# EAGLE board rough (EAGLE 4.13)
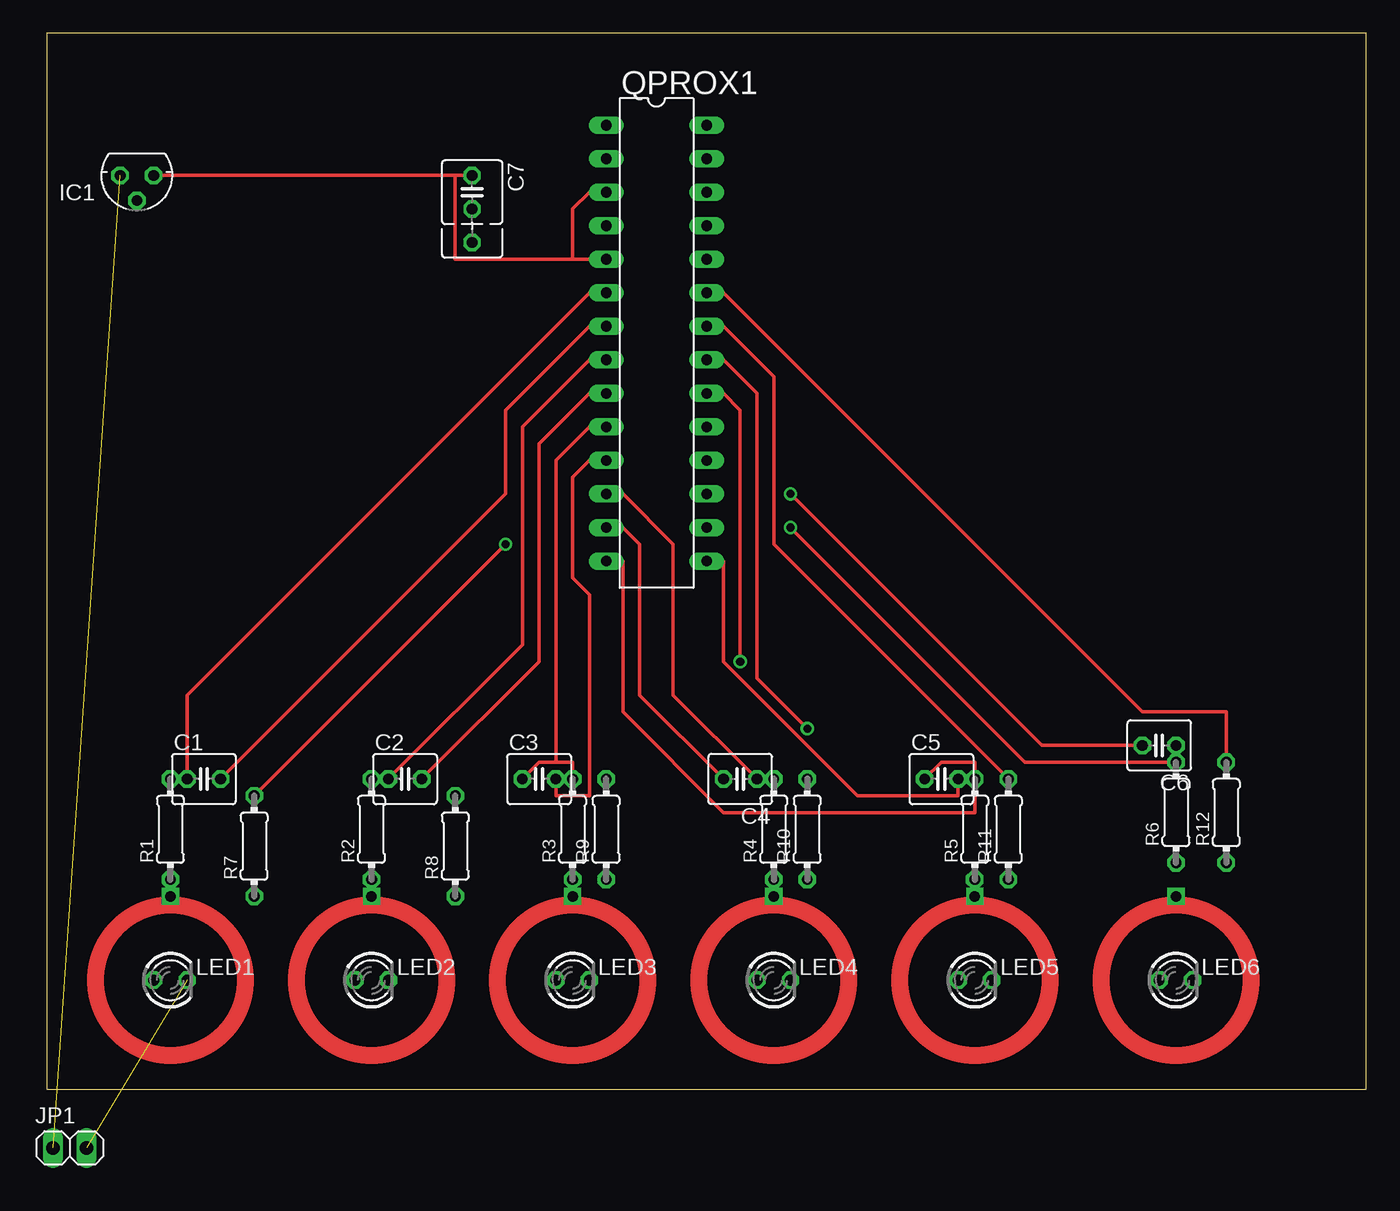
[diagram p0: board, top side]
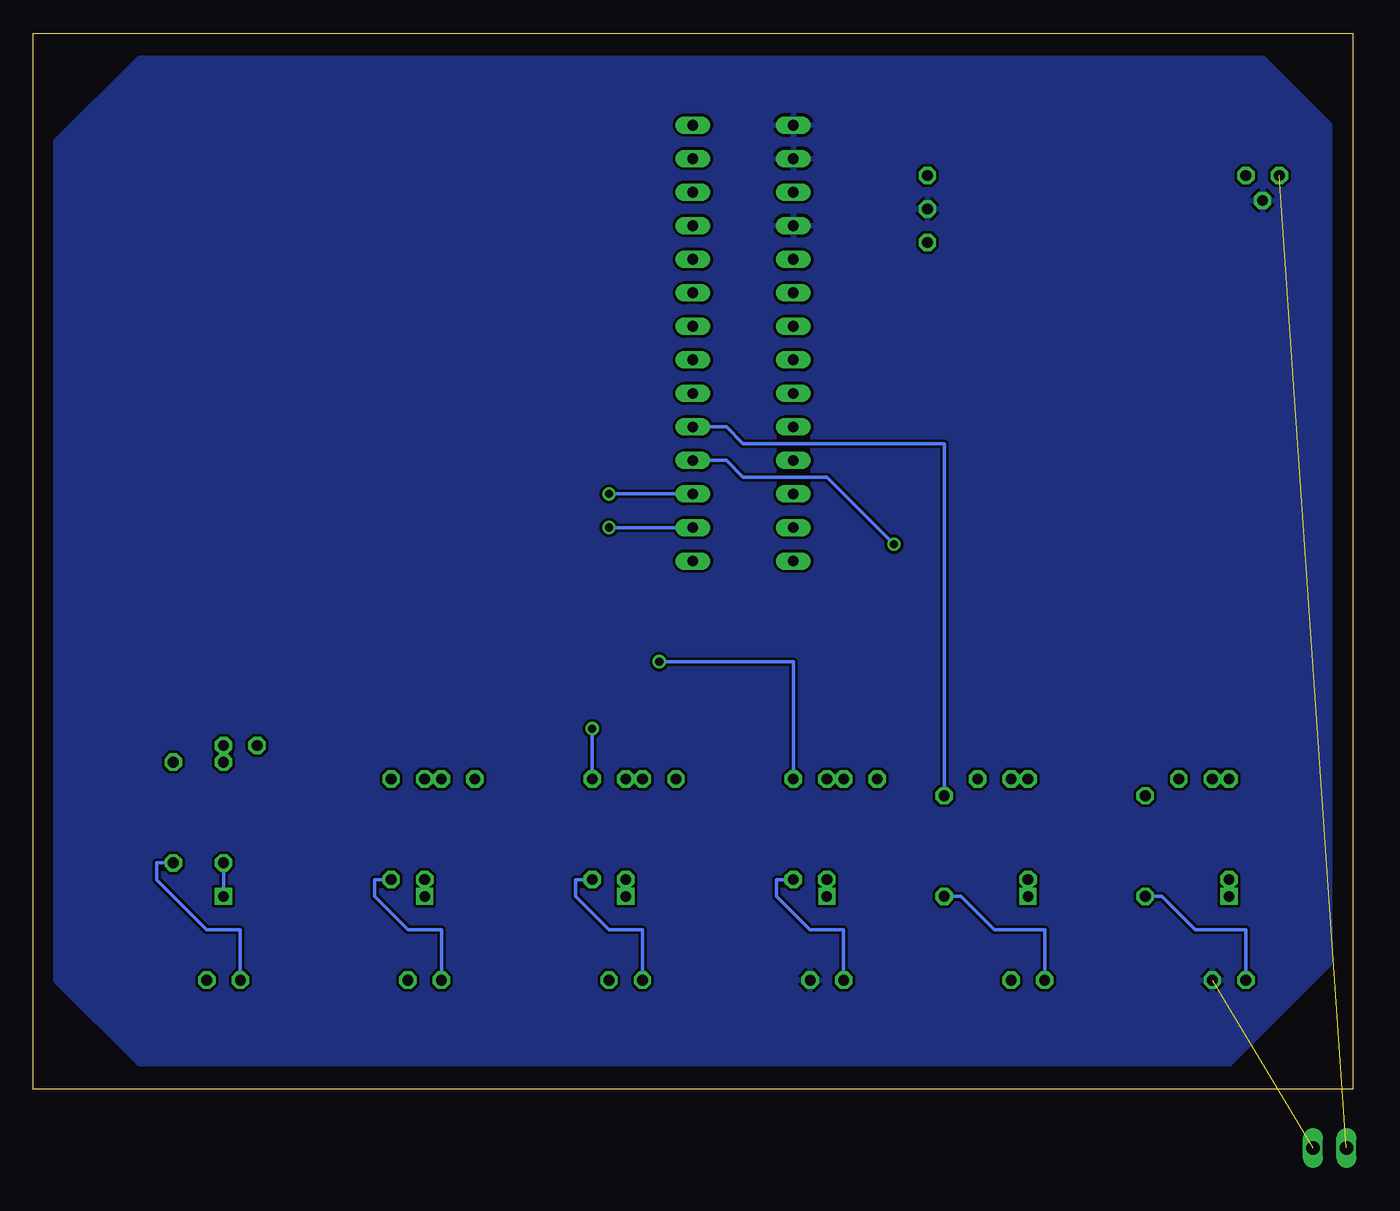
[diagram p1: board, bottom side, seen from below]

Size 100 x 80 mm. Coordinates in mm from the lower left corner, seen from the top.
Outline: 0,0 100,0 100,80 0,80 0,0
Copper layers (1*16): Top 0.035mm / dielectric 1.5mm / Bottom 0.035mm
Design rules "default": minimum track width 10mil, minimum drill 24mil, track to track 8mil, track to pad 8mil, pad to pad 8mil, via to via 8mil, smd to smd 8mil, copper to edge 40mil, drill to drill 8mil, minimum pad ring 10mil, minimum via ring 8mil, stop-mask expansion 4mil, vias tented up to drill 0mil, thermal gap 10mil

## Footprints (pad centres in the part's own frame; a part is rotated, then mirrored left to right if it is on the bottom)
C025-040X050 = drill 0.813 octagon: 1 -1.27,0; 2 1.27,0
C025_050-045X075 = drill 0.813 octagon: 1 -1.27,0; 2 1.27,0; 3 3.81,0
78LXX = drill 0.813 octagon: GND 0,1.905; IN 1.27,0; OUT -1.27,0
1X02 = drill 1.016 long: 1 -1.27,0; 2 1.27,0
LED3MM = drill 0.813 octagon: A -1.27,0; K 1.27,0
DIL28-3 = drill 0.813 long: 1 -16.51,-3.81; 2 -13.97,-3.81; 3 -11.43,-3.81; 4 -8.89,-3.81; 5 -6.35,-3.81; 6 -3.81,-3.81; 7 -1.27,-3.81; 8 1.27,-3.81; 9 3.81,-3.81; 10 6.35,-3.81; 11 8.89,-3.81; 12 11.43,-3.81; 13 13.97,-3.81; 14 16.51,-3.81; 15 16.51,3.81; 16 13.97,3.81; 17 11.43,3.81; 18 8.89,3.81; 19 6.35,3.81; 20 3.81,3.81; 21 1.27,3.81; 22 -1.27,3.81; 23 -3.81,3.81; 24 -6.35,3.81; 25 -8.89,3.81; 26 -11.43,3.81; 27 -13.97,3.81; 28 -16.51,3.81
0204/7 = drill 0.813 octagon: 1 -3.81,0; 2 3.81,0
PAD1 = drill 0.8 square: P$1 0,6.35

## Placement (x,y rotation side)
C1  [C025-040X050]  11.9,23.49 0 top
C2  [C025-040X050]  27.14,23.49 0 top
C3  [C025-040X050]  37.3,23.49 0 top
C4  [C025-040X050]  52.54,23.49 180 top
C5  [C025-040X050]  67.78,23.49 0 top
C6  [C025-040X050]  84.29,26.03 180 top
C7  [C025_050-045X075]  32.22,67.94 270 top
IC1  [78LXX]  6.82,69.21 180 top
JP1  [1X02]  1.74,-4.45 0 top  (outside the outline)
LED1  [LED3MM]  9.36,8.25 0 top
LED2  [LED3MM]  24.6,8.25 0 top
LED3  [LED3MM]  39.84,8.25 0 top
LED4  [LED3MM]  55.08,8.25 0 top
LED5  [LED3MM]  70.32,8.25 0 top
LED6  [LED3MM]  85.56,8.25 0 top
QPROX1  [DIL28-3]  46.19,56.51 270 top
R1  [0204/7]  9.36,19.68 90 top
R2  [0204/7]  24.6,19.68 90 top
R3  [0204/7]  39.84,19.68 90 top
R4  [0204/7]  55.08,19.68 90 top
R5  [0204/7]  70.32,19.68 90 top
R6  [0204/7]  85.56,20.95 90 top
R7  [0204/7]  15.71,18.41 90 top
R8  [0204/7]  30.95,18.41 90 top
R9  [0204/7]  42.38,19.68 90 top
R10  [0204/7]  57.62,19.68 90 top
R11  [0204/7]  72.86,19.68 90 top
R12  [0204/7]  89.37,20.95 90 top
U$1  PAD  [PAD1]  9.36,8.25 0 top
U$2  PAD  [PAD1]  24.6,8.25 0 top
U$3  PAD  [PAD1]  39.84,8.25 0 top
U$4  PAD  [PAD1]  55.08,8.25 0 top
U$5  PAD  [PAD1]  70.32,8.25 0 top
U$6  PAD  [PAD1]  85.56,8.25 0 top

## Library data of the parts
C1-C7 R1-R12 = rcl
IC1 = v-reg
JP1 = pinhead
LED1-LED6 = led
QPROX1 U$1-U$6 = QProx

## Nets
GND: C7.2 IC1.GND JP1.2 LED1.K LED3.K QPROX1.1 QPROX1.2 QPROX1.4
N$1: C1.1 QPROX1.6 R1.2
N$2: C2.1 QPROX1.8 R2.2
N$3: C3.1 QPROX1.10 R3.2
N$4: C4.1 QPROX1.12 R4.2
N$5: C5.1 QPROX1.14 R5.2
N$6: C6.1 QPROX1.16 R6.2
N$7: R1.1 U$1.P$1
N$8: C1.2 QPROX1.7
N$9: R2.1 U$2.P$1
N$10: C2.2 QPROX1.9
N$11: R3.1 U$3.P$1
N$12: C3.2 QPROX1.11
N$13: R4.1 U$4.P$1
N$14: C4.2 QPROX1.13
N$15: R5.1 U$5.P$1
N$16: C5.2 QPROX1.15
N$17: R6.1 U$6.P$1
N$18: C7.1 IC1.OUT QPROX1.3 QPROX1.5
N$19: C6.2 QPROX1.17
N$20: QPROX1.23 R12.2
N$21: LED1.A R7.1
N$22: LED2.A R8.1
N$23: LED3.A R9.1
N$24: LED4.A R10.1
N$25: LED6.A R12.1
N$26: LED5.A R11.1
N$27: QPROX1.22 R11.2
N$28: QPROX1.21 R10.2
N$29: QPROX1.20 R9.2
N$30: QPROX1.19 R8.2
N$31: QPROX1.18 R7.2
N$32: IC1.IN JP1.1

## Tracks (layer width: path | path; a pad name or v marks a point on that pad's centre or on a via)
GND  (1 unrouted)
  pour Bottom: 1.74,71.75 1.74,73.02 6.82,78.1 91.91,78.1 98.26,71.75 98.26,8.25 91.91,1.9 9.36,1.9 1.74,9.52
N$1
  Top 0.254: R1.2 C1.1 10.63,29.84 41.11,60.32 QPROX1.6
N$2
  Top 0.254: R2.2 C2.1 36.03,33.65 36.03,50.16 41.11,55.24 QPROX1.8
N$3
  Top 0.254: C3.1 37.3,24.76 38.57,24.76 | 38.57,24.76 39.84,24.76 R3.2 | 38.57,24.76 38.57,47.62 41.11,50.16 QPROX1.10
N$4
  Top 0.254: R4.2 C4.1 47.46,29.84 47.46,41.27 43.65,45.08 QPROX1.12
N$5
  Top 0.254: C5.1 67.78,24.76 70.32,24.76 R5.2 70.32,20.95 51.27,20.95 43.65,28.57 43.65,40 QPROX1.14
N$6  (via drill 0.61)
  Top 0.254: C6.1 R6.2 74.13,24.76 v56.35,42.54
  Bottom 0.254: QPROX1.16 v56.35,42.54
N$7
  Bottom 0.254: U$1.P$1 R1.1
N$8
  Top 0.254: C1.2 34.76,45.08 34.76,51.43 41.11,57.78 QPROX1.7
N$9
  Bottom 0.254: U$2.P$1 R2.1
N$10
  Top 0.254: C2.2 37.3,32.38 37.3,48.89 41.11,52.7 QPROX1.9
N$11
  Bottom 0.254: U$3.P$1 R3.1
N$12
  Top 0.254: C3.2 38.57,22.22 41.11,22.22 41.11,37.46 39.84,38.73 39.84,46.35 41.11,47.62 QPROX1.11
N$13
  Bottom 0.254: U$4.P$1 R4.1
N$14
  Top 0.254: C4.2 44.92,29.84 44.92,41.27 43.65,42.54 QPROX1.13
N$15
  Bottom 0.254: U$5.P$1 R5.1
N$16
  Top 0.254: C5.2 69.05,22.22 61.43,22.22 51.27,32.38 51.27,40 QPROX1.15
N$17
  Bottom 0.254: U$6.P$1 R6.1
N$18
  Top 0.254: 30.95,69.21 C7.1 | IC1.OUT 30.95,69.21 | 39.84,62.86 30.95,62.86 30.95,69.21 | 39.84,62.86 QPROX1.5 | 39.84,62.86 39.84,66.67 41.11,67.94 QPROX1.3
N$19  (via drill 0.61)
  Top 0.254: v56.35,45.08 75.4,26.03 C6.2
  Bottom 0.254: QPROX1.17 v56.35,45.08
N$20
  Top 0.254: R12.2 89.37,28.57 83.02,28.57 51.27,60.32 QPROX1.23
N$21
  Bottom 0.254: LED1.A 8.09,12.06 11.9,12.06 14.44,14.6 R7.1
N$22
  Bottom 0.254: LED2.A 23.33,12.06 27.14,12.06 29.68,14.6 R8.1
N$23
  Bottom 0.254: LED3.A 38.57,12.06 41.11,12.06 43.65,14.6 43.65,15.87 R9.1
N$24
  Bottom 0.254: LED4.A 53.81,12.06 56.35,12.06 58.89,14.6 58.89,15.87 R10.1
N$25
  Bottom 0.254: LED6.A 84.29,12.06 86.83,12.06 90.64,15.87 90.64,17.14 R12.1
N$26
  Bottom 0.254: LED5.A 69.05,12.06 71.59,12.06 74.13,14.6 74.13,15.87 R11.1
N$27
  Top 0.254: R11.2 55.08,41.27 55.08,53.97 51.27,57.78 QPROX1.22
N$28  (via drill 0.61)
  Top 0.254: v57.62,27.3 53.81,31.11 53.81,52.7 51.27,55.24 QPROX1.21
  Bottom 0.254: R10.2 v57.62,27.3
N$29  (via drill 0.61)
  Top 0.254: v52.54,32.38 52.54,51.43 51.27,52.7 QPROX1.20
  Bottom 0.254: R9.2 42.38,32.38 v52.54,32.38
N$30
  Bottom 0.254: R8.2 30.95,48.89 46.19,48.89 47.46,50.16 QPROX1.19
N$31  (via drill 0.61)
  Top 0.254: R7.2 v34.76,41.27
  Bottom 0.254: v34.76,41.27 39.84,46.35 46.19,46.35 47.46,47.62 QPROX1.18
N$32  (1 unrouted)